# Altium PCB pcb.PcbDoc
Units mm, origin at the board's own origin, x right, y up, seen from the top; angles counter-clockwise.
Board outline 100 x 50 mm, 2 copper layers (Top Layer, Bottom Layer); 36 components, 24 nets, 91 pads, 0 vias.
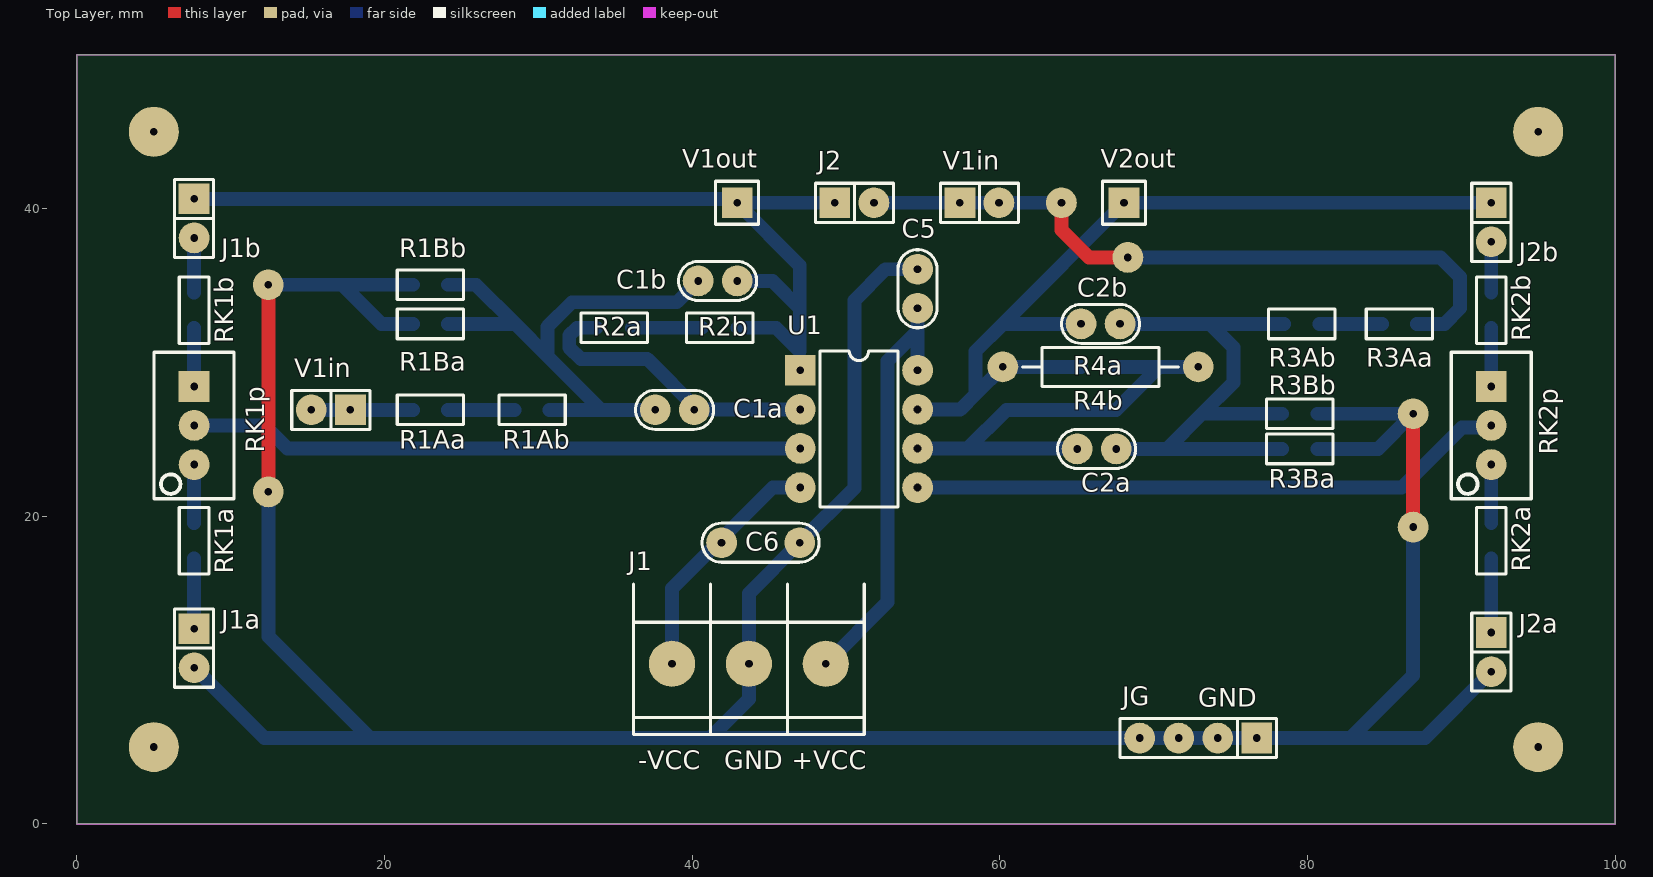
[diagram p0: Top Layer view]
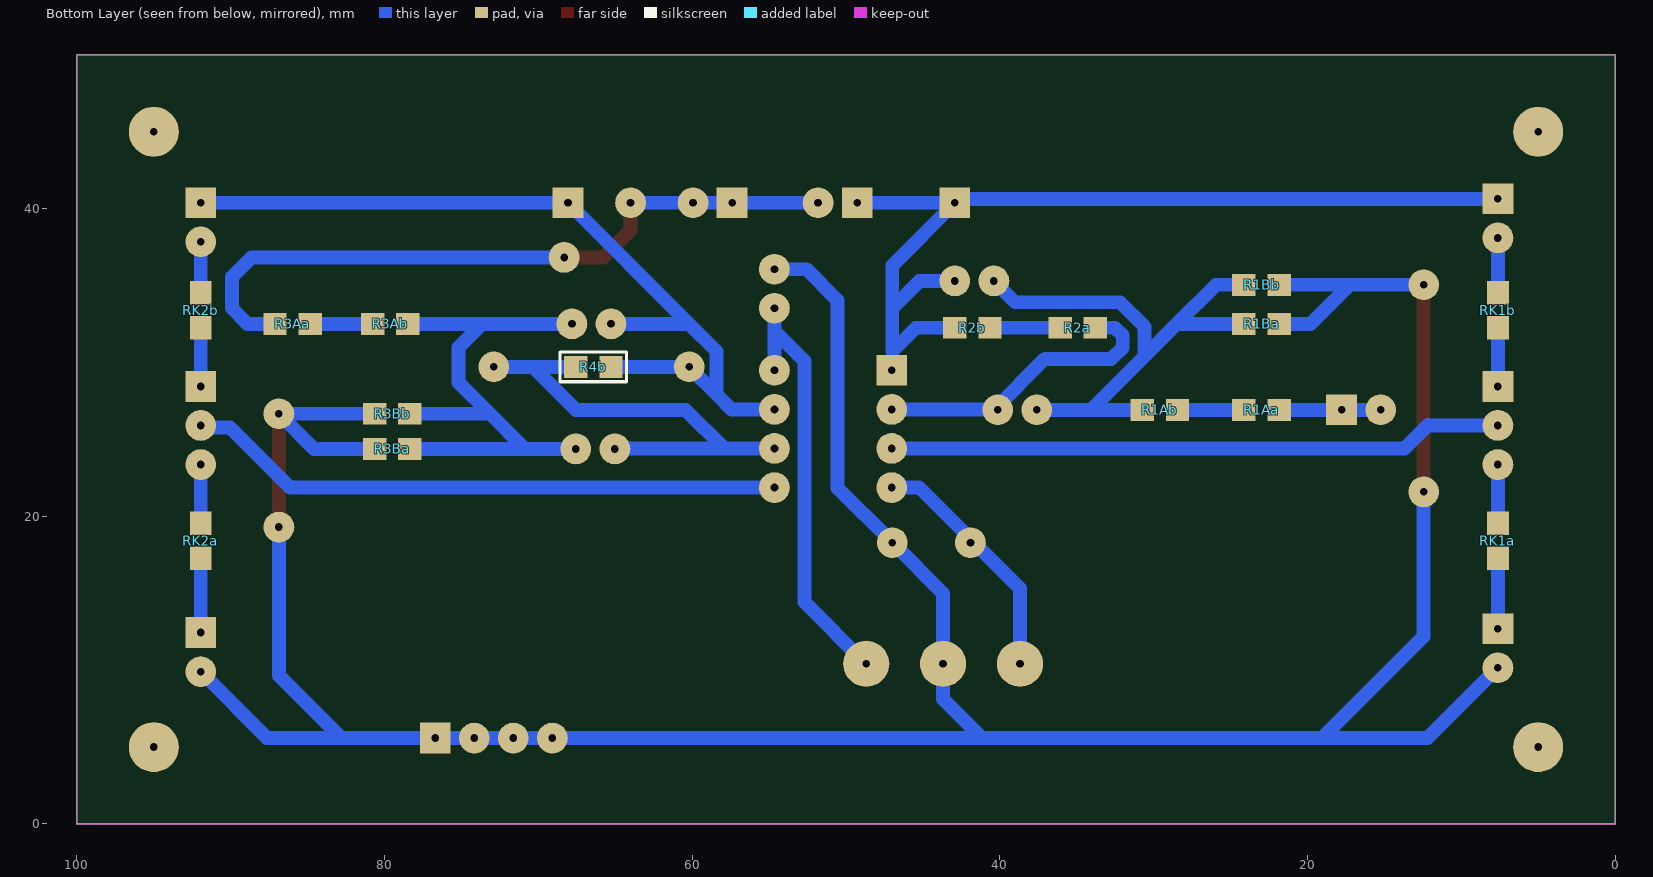
[diagram p1: Bottom Layer view, seen from below]
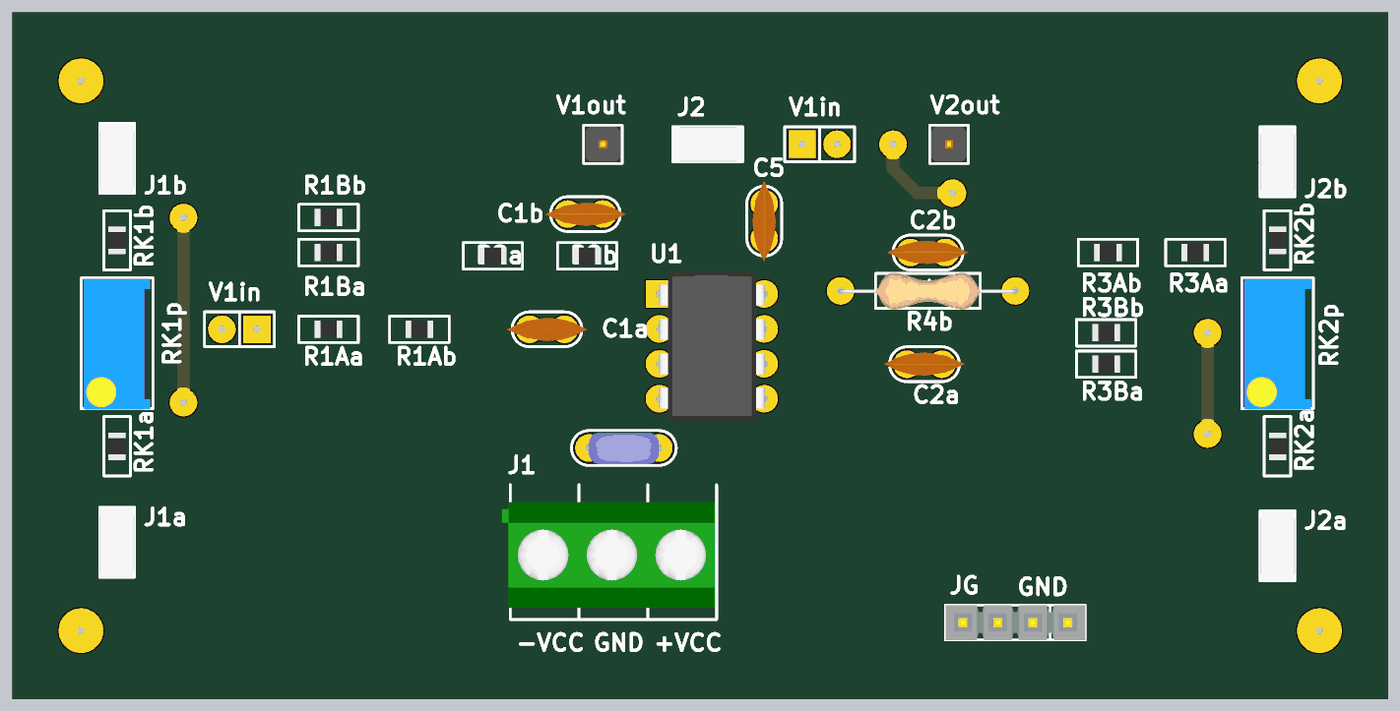
[diagram p2: 3D render of the assembled board from above, using the file's embedded part models]

## Layer stack, top to bottom
Top Solder: solder mask 0.0102, Solder Resist, Dk 3.5
Top Layer: signal copper 0.0356
Dielectric 1: dielectric 0.32, FR-4, Dk 4.8
Bottom Layer: signal copper 0.0356
Bottom Solder: solder mask 0.0102, Solder Resist, Dk 3.5

## Board outline
0,0 100,0 100,50 0,50

## Design rules (kind name [scope] priority, off if disabled: settings)
Clearance [All] p1: gap=0.5 ignorepadtopadclearanceinfootprint=FALSE
PolygonConnect [All] p1: connectstyle=Relief reliefconductorwidth=0.254 reliefentries=4 polygonreliefangle="90 Angle" airgapwidth=0.254
RoutingVias [All] p1: holewidth=0.5 width=2 viastyle="Through Hole" minholewidth=0.3 minwidth=1.5 maxholewidth=0.5 maxwidth=2
SolderMaskExpansion [All] p1: expansion=0.102
Width [All] p1: maxlimit=0.9 minlimit=0.6 preferedwidth=0.9
30 further rules are at their usual default settings.

## Classes and differential pairs
component class sch: C1a C1b C2a C5 C6 J1 J1a J1b J2 J2a J2b JG JV2 R1Aa R1Ab R1Ba R1Bb R2a R2b R3Aa R3Ab R3Ba R3Bb RK1a RK1b RK1p RK2a RK2b RK2p TP4 U1 V1in V1out V2out

## Components (designator, comment, footprint, x,y, rotation, side; value= is the part's Value field where it differs from the comment)
C1a "470p" CAP100 38.862,26.924 r180 top
C1b "470p" CAP100 41.656,35.306 r180 top
C2a "820p" CAP100 66.294,24.384 r0 top
C2b "820p" CAP100 66.548,32.512 r0 top
C5 "100n" CAP100 54.652,34.798 r90 top
C6 "100n" CAP200 44.45,18.288 r0 top
J1 "BORNERA 3" BORNERA3 43.688,10.414 r90 top
J1a "JUMPER" JUMPER2 7.62,11.43 r270 top
J1b "JUMPER" JUMPER2 7.62,39.37 r270 top
J2 "JUMPER" JUMPER2 50.546,40.386 r0 top
J2a "JUMPER" JUMPER2 91.948,11.176 r270 top
J2b "JUMPER" JUMPER2 91.948,39.116 r270 top
JG "CON4" SIP4 72.898,5.588 r180 top
R1Aa "68.0k" 0805#1 22.987,26.924 r0 top
R1Ab "8.20k" 0805#1 29.591,26.924 r0 top
R1Ba "150k" 0805#1 22.987,32.512 r0 top
R1Bb "2.20k" 0805#1 22.987,35.052 r0 top
R2a "1.00k" 0805#1 34.925,32.258 r0 top
R2b "18.0k" 0805#1 41.783,32.258 r0 top
R3Aa "39.0k" 0805#1 85.979,32.512 r180 top
R3Ab "820" 0805#1 79.629,32.512 r180 top
R3Ba "1.50k" 0805#1 79.502,24.384 r180 top
R3Bb "4.70k" 0805#1 79.502,26.67 r180 top
R4a "1.80M" RES500 72.898,29.718 r180 top
R4b "10.0k" 0805#2 66.421,29.718 r180 bottom
RK1a "1.50k" 0805#1 7.62,18.415 r90 top
RK1b "8.20k" 0805#1 7.62,33.401 r90 top
RK1p "200" "PRESET V" 7.62,25.908 r270 top
RK2a "1.50k" 0805#1 91.948,18.415 r90 top
RK2b "8.20k" 0805#1 91.948,33.401 r90 top
RK2p "200" "PRESET V" 91.948,25.908 r270 top
U1 "LM833" DIP8 47.032,29.492 r0 top
V1in "CON2" SIP2 58.674,40.386 r0 top (schematic designator JV2)
V1in "CON2" SIP2 16.51,26.924 r180 top (schematic designator JV1)
V1out "TP" TPTH 42.926,40.386 r0 top (schematic designator TP2)
V2out "TP" TPTH 68.072,40.386 r0 top (schematic designator TP4)

## Footprints (in the part's own frame and the unit in brackets; to place one, negate y for a bottom-side part, rotate by r counter-clockwise, add the part's x,y. Pads: shape width x height; smd on the part's side, far side on the other; paste and mask are expansions set on the pad)
0805#1 [mil] "Pasivo 0805"
  rect 60x56 smd far side: 1(-45,0) 2(45,0)
  silkscreen extent -85,-38 85,38, body extent -40,-24 39,25, height 15
0805#2 [mil] "Pasivo 0805"
  rect 60x56 smd: 1(-45,0) 2(45,0)
  silkscreen extent -85,-38 85,38, body extent -40,-25 39,25, height 15
BORNERA3 [mm] "Bornera con Tornillos 5mm separación"
  round 3 hole 0.5: 1(0,5) 2(0,0) 3(0,-5)
  silkscreen extent -4.6,-7.5 5.2,7.5, body extent -3.76,-7.39 3.94,8.11, height 10.05
CAP100 [mm]
  round 2 hole 0.5: 1(-1.27,0) 2(1.27,0)
  silkscreen extent -2.54,-1.27 2.54,1.27, body extent -2.92,-0.84 2.92,0.86, height 6.12
CAP200 [mm]
  round 2 hole 0.5: 1(-2.54,0) 2(2.54,0)
  silkscreen extent -3.81,-1.27 3.81,1.27, body extent -2.79,-1.17 2.79,1.12, height 6.24
DIP8 [mm]
  rect 2x2 hole 0.5: 1(0,0)
  round 2 hole 0.5: 2(0,-2.54) 3(0,-5.08) 4(0,-7.62) 5(7.62,-7.62) 6(7.62,-5.08) 7(7.62,-2.54) 8(7.62,0)
  silkscreen extent 1.27,-8.89 6.35,1.27, body extent -0.06,-9.21 7.7,1.59, height 4.5
JUMPER2 [mm]
  rect 2x2 hole 0.5: 1(-1.27,0)
  round 2 hole 0.5: 2(1.27,0)
  silkscreen extent -2.54,-1.27 2.54,1.27, body extent -2.46,-1.27 2.54,1.27, height 9.5
"PRESET V" [mm]
  rect 2x2 hole 0.5: 1(-2.54,0)
  round 2 hole 0.5: 2(0,0) 3(2.54,0)
  silkscreen extent -4.76,-2.6 4.76,2.6, body extent -4.7,-2.42 4.83,2.42, height 11.55
RES500 [mm]
  round 2 hole 0.5: 1(0,0) 2(12.7,0)
  silkscreen extent 1.27,-1.27 11.43,1.27, body extent -0.13,-1.33 12.83,1.37, height 3.02
SIP2 [mm]
  rect 2x2 hole 0.5: 1(-1.27,0)
  round 2 hole 0.5: 2(1.27,0)
  silkscreen extent -2.54,-1.27 2.54,1.27
SIP4 [mm]
  rect 2x2 hole 0.5: 1(-3.81,0)
  round 2 hole 0.5: 2(-1.27,0) 3(1.27,0) 4(3.81,0)
  silkscreen extent -5.08,-1.27 5.08,1.27, body extent -5.08,-1.27 5.08,1.27, height 8.38
TPTH [mm]
  rect 2x2 hole 0.5: 1(0,0)
  silkscreen extent -1.4,-1.4 1.4,1.4, body extent -1.27,-1.27 1.27,1.27, height 6.04

## Part data
C1a C1b C2a C2b C5 C6: library part CAP
R1Aa R1Ab R1Ba R1Bb R2a R2b R3Aa R3Ab R3Ba R3Bb R4a R4b RK1a RK1b RK2a RK2b: library part RES
RK1p RK2p: library part PRESET
U1: "Dual Audio Operational Amplifier"

## Free pads (board coordinates)
  round 3.25 hole 0.5: 9(5,45) 10(95,45) 11(95,5) 12(5,5)
  round 2 hole 0.5: 16(64.008,40.386) 17(68.326,36.83) 18(12.446,35.052) 19(12.446,21.59) 20(86.868,26.67) 21(86.868,19.304)

## Nets (pads, with @x,y where several pads share a name; then routed paths per layer and width w, separated by ;. In a path a pad name is that pad's centre, name@x,y a point inside that pad or via, vN(x,y) a via of type N, cw(c..) or ccw(c..) an arc to the next point about the centre after c; other vN are vias at no path point)
+VCC: C5.1 J1.3 U1.8 | length 27.6
  Bottom Layer w0.9: J1.3 52.702,14.428 52.702,30.096 54.652,32.046 ; C5.1@54.61,33.02 54.652,32.978 54.652,32.046 ; U1.8 54.652,32.046
-VCC: C6.1 J1.1 U1.4 | length 16
  Bottom Layer w0.9: J1.1 38.688,15.32 45.24,21.872 U1.4
GND: C5.2 C6.2 J1.2 J1a.2 J2a.2 JG.1 JG.2 JG.3 JG.4 pad.18 pad.19 pad.20 pad.21 R1Ba.1 R1Bb.1 R3Ba.1 R3Bb.1 | length 208.7
  Top Layer w0.9: pad.19 pad.18 ; pad.21 pad.20
  Bottom Layer w0.9: J1a.2 12.192,5.588 19.05,5.588 ; pad.19 12.446,12.192 19.05,5.588 ; pad.18 17.272,35.052 ; R1Ba.1 19.812,32.512 17.272,35.052 ; R1Bb.1 17.272,35.052 ; C5.2 52.578,36.068 50.546,34.036 50.546,21.844 C6.2 43.688,14.986 J1.2 43.688,8.128 41.148,5.588 ; R3Ba.1 84.582,24.384 pad.20 R3Bb.1 ; pad.21 86.868,9.652 82.804,5.588 ; J2a.2 87.63,5.588 82.804,5.588 ; 19.05,5.588 41.148,5.588 ; 41.148,5.588 JG.4 JG.3 JG.2 JG.1 82.804,5.588
NetC1a_1: C1a.1 R2a.1 U1.2 | length 19.5
  Bottom Layer w0.9: R2a.1 32.512,32.258 32.004,31.75 32.004,30.988 32.766,30.226 37.084,30.226 40.358,26.952 U1.2
NetC1a_2: C1a.2 C1b.2 R1Ab.2 R1Ba.2 R1Bb.2 | length 37.5
  Bottom Layer w0.9: R1Ba.2 28.5,32.512 ; R1Bb.2 25.96,35.052 28.5,32.512 ; R1Ab.2 34.088,26.924 ; C1a.2 34.088,26.924 ; C1b.2 38.999,33.919 32.193,33.919 30.604,32.33 30.604,30.408 ; 28.5,32.512 30.604,30.408 ; 30.604,30.408 34.088,26.924
NetC2a_1: C2a.1 R4a.1 R4b.1 U1.6 | length 30.4
  Bottom Layer w0.9: U1.6@54.68,24.384 U1.6 57.912,24.412 ; C2a.1 64.996,24.412 57.912,24.412 ; R4b.1 70.358,29.718 ; R4a.1 70.358,29.718 ; 57.912,24.412 60.424,26.924 67.564,26.924 70.358,29.718
NetC2a_2: C2a.2 C2b.2 R3Ab.2 R3Ba.2 R3Bb.2 | length 37.2
  Bottom Layer w0.9: C2a.2 70.866,24.384 ; C2b.2 73.66,32.512 ; R3Ba.2 70.866,24.384 ; R3Bb.2 73.152,26.67 ; R3Ab.2 73.66,32.512 ; 70.866,24.384 73.152,26.67 ; 73.152,26.67 75.184,28.702 75.184,30.988 73.66,32.512
NetJ1a_1: J1a.1 RK1a.1 | length 4.6
  Bottom Layer w0.9: J1a.1 RK1a.1
NetJ1b_2: J1b.2 RK1b.2 | length 3.6
  Bottom Layer w0.9: RK1b.2 J1b.2
NetJ2a_1: J2a.1 RK2a.1 | length 4.8
  Bottom Layer w0.9: J2a.1 RK2a.1
NetJ2b_2: J2b.2 RK2b.2 | length 3.3
  Bottom Layer w0.9: RK2b.2 J2b.2
NetR1Aa_2: R1Aa.2 R1Ab.1 | length 4.3
  Bottom Layer w0.9: R1Aa.2 R1Ab.1
NetR2a_2: R2a.2 R2b.1 | length 4.6
  Bottom Layer w0.9: R2a.2 R2b.1
NetR3Aa_2: R3Aa.2 R3Ab.1 | length 4.1
  Bottom Layer w0.9: R3Ab.1 R3Aa.2
NetRK1a_2: RK1a.2 RK1p.3 | length 3.8
  Bottom Layer w0.9: RK1a.2 RK1p.3
NetRK1b_1: RK1b.1 RK1p.1 | length 3.8
  Bottom Layer w0.9: RK1p.1 RK1b.1
NetRK1p_2: RK1p.2 U1.3 | length 40
  Bottom Layer w0.9: RK1p.2 12.192,25.908 13.688,24.412 U1.3
NetRK2a_2: RK2a.2 RK2p.3 | length 3.8
  Bottom Layer w0.9: RK2a.2 RK2p.3
NetRK2b_1: RK2b.1 RK2p.1 | length 3.8
  Bottom Layer w0.9: RK2p.1 RK2b.1
NetRK2p_2: RK2p.2 U1.5 | length 38.9
  Bottom Layer w0.9: U1.5 86.134,21.872 90.043,25.781 RK2p.2@91.948,25.781
V1in: R1Aa.1 V1in.1@17.78,26.924 V1in.2@15.24,26.924 | length 6.6
  Bottom Layer w0.9: V1in.2@15.24,26.924 17.78,26.924 R1Aa.1
V1out: C1b.1 J1b.1 J2.1 R2b.2 U1.1 V1out.1 | length 62.6
  Bottom Layer w0.9: J1b.1 42.672,40.64 V1out.1 ; R2b.2 45.466,32.258 46.99,30.734 46.99,33.528 ; C1b.1 45.212,35.306 46.99,33.528 ; J2.1 V1out.1 ; V1out.1 46.99,36.322 46.99,33.528
V2in: J2.2 pad.16 pad.17 R3Aa.1 V1in.1@57.404,40.386 V1in.2@59.944,40.386 | length 46.4
  Top Layer w0.9: pad.16 64.008,38.608 65.786,36.83 pad.17
  Bottom Layer w0.9: J2.2 57.404,40.386 59.944,40.386 pad.16 ; pad.17 88.646,36.83 89.916,35.56 89.916,33.528 88.9,32.512 R3Aa.1
V2out: C2b.1 J2b.1 R4a.2 R4b.2 U1.7 V2out.1 | length 57.2
  Bottom Layer w0.9: U1.7@54.68,26.924 U1.7 57.432,26.952 58.42,27.94 ; R4b.2 R4a.2 58.42,27.94 ; C2b.1 60.198,32.512 ; J2b.1 V2out.1 60.198,32.512 ; 58.42,27.94 58.42,30.734 60.198,32.512

## Keep-outs
Keep-Out Layer:
  the board outline again, w0.1

## Silkscreen, mask and mechanical layers (free items; w line width, h text height)
Top Overlay:
  text "GND" at 72.898,7.62 h1.2
  text "-VCC" at 36.489,3.556 h1.2
  text "GND" at 42.089,3.556 h1.2
  text "+VCC" at 46.489,3.556 h1.2